# EAGLE board Module_T+H_04v (EAGLE 7.7.0)
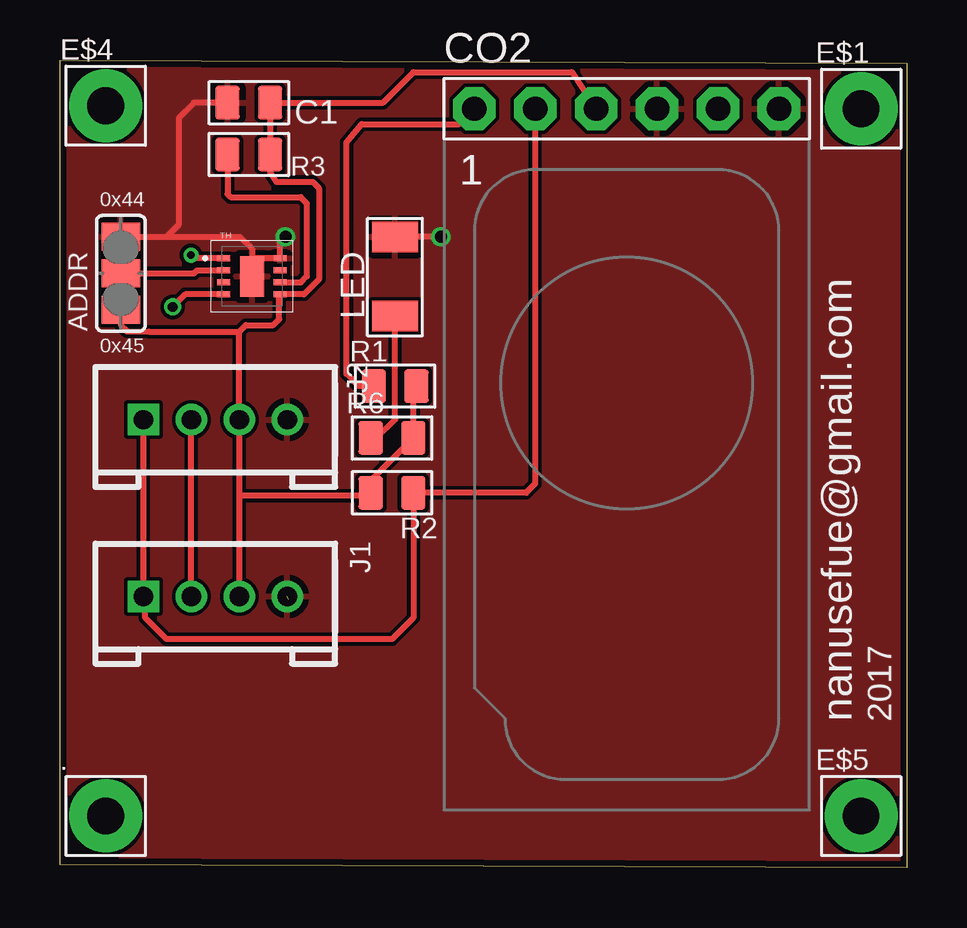
[diagram p0: board, top side]
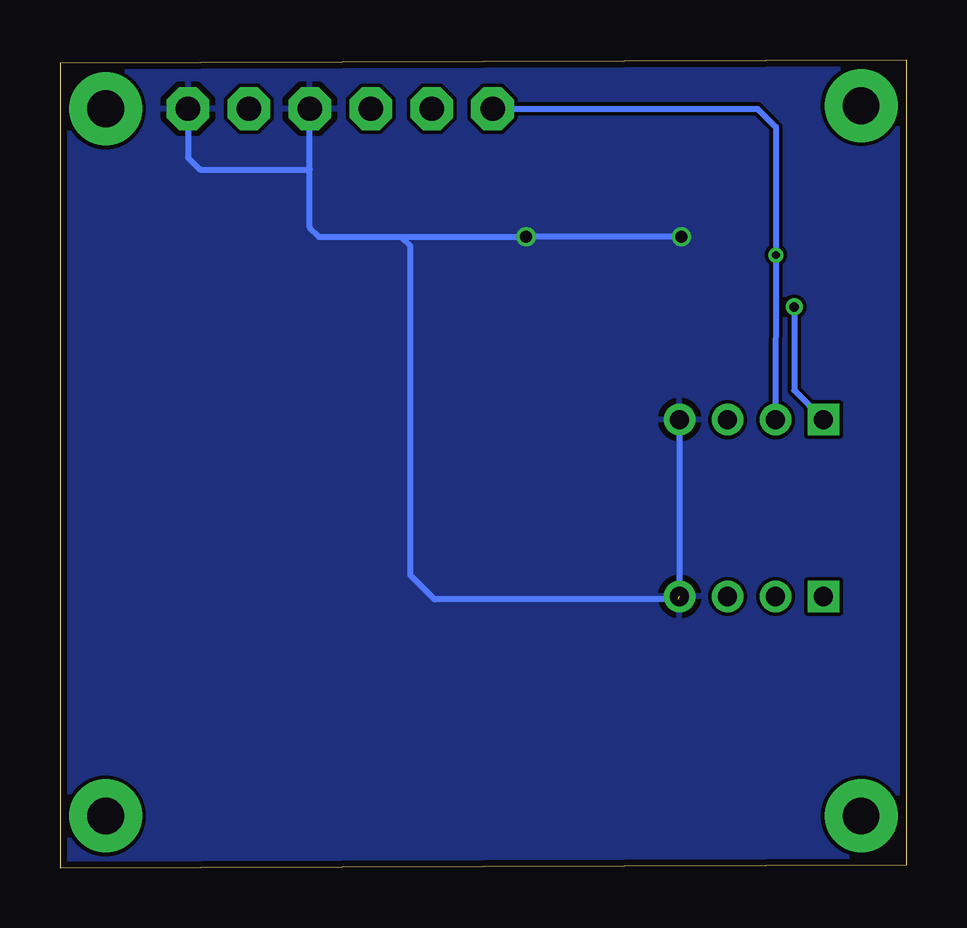
[diagram p1: board, bottom side, seen from below]

Size 35.31 x 33.66 mm. Coordinates in mm from the lower left corner, seen from the top.
Outline: 0,0.13 0,33.66 35.31,33.53 35.31,0 0,0.13
Copper layers (1*16): Top 0.035mm / dielectric 1.5mm / Bottom 0.035mm
Design rules "SeeedStudio_2layer_DRU_no_angle_20140221": minimum track width 6mil, minimum drill 12mil, track to track 6mil, track to pad 6mil, pad to pad 6mil, via to via 6mil, smd to smd 0mil, copper to edge 10mil, drill to drill 10mil, minimum pad ring 10mil, minimum via ring 6mil, stop-mask expansion 2mil, vias tented up to drill 100mil, thermal gap 10mil

## Footprints (pad centres in the part's own frame; a part is rotated, then mirrored left to right if it is on the bottom)
1P-100/60MIL = drill 1.524 pad 3.048: 1 0,0
SJ_2 = smd 1.168 x 1.6: 1 -1.524,0; 2 0,0; 3 1.524,0
C0805 = smd 1.397 x 1.016: 1 0,0.889; 2 0,-0.889
PINS = drill 1.016 pad 1.778 octagon: GND 1.27,0; NC/GND/10K 6.35,0; PWM/FC 3.81,0; RX/SCL -3.81,0; TX/SDA -6.35,0; VCC -1.27,0
HW4-2.0 = drill 0.8 pad 1.27 square: 1 -3,0 | drill 0.8 pad 1.27: 2 -1,0; 3 1,0; 4 3,0
LED1206FAB = smd 1.27 x 1.905: 1 -1.651,0; 2 1.651,0
R0805 = smd 1.397 x 1.016: 1 0,0.889; 2 0,-0.889
SHT3X = smd 0.55 x 0.25: P$1 -1.175,0.75; P$2 -1.175,0.25; P$3 -1.175,-0.25; P$4 -1.175,-0.75; P$5 1.175,-0.75; P$6 1.175,-0.25; P$7 1.175,0.25; P$8 1.175,0.75 | smd 1 x 1.7: PAD 0,0

## Placement (x,y rotation side)
.  GND  [1P-100/60MIL]  1.91,2.16 0 top
ADDR  [SJ_2]  2.54,24.77 90 top
C1  100nf  [C0805]  7.87,31.88 270 top
CO2  T6713-6H  [PINS]  23.62,31.62 0 top
E$1  [1P-100/60MIL]  33.4,31.62 0 top
E$4  [1P-100/60MIL]  1.91,31.75 0 top
E$5  gnd  [1P-100/60MIL]  33.4,2.16 0 top
J1  4P-2.0  [HW4-2.0]  6.48,11.3 0 top
J2  4P-2.0  [HW4-2.0]  6.48,18.67 0 top
LED  LEDFAB1206  [LED1206FAB]  13.97,24.64 90 top
R1  10K  [R0805]  13.97,20.07 90 top
R2  10K  [R0805]  13.84,15.62 270 top
R3  10K  [R0805]  7.87,29.72 90 top
R6  1.5K  [R0805]  13.84,17.91 90 top
TH  SHT31-DIS  [SHT3X]  8,24.64 0 top

## Library data of the parts
. E$1 E$4 E$5 J1 J2 = Seeed-OPL-Connector
ADDR = jumper
C1 = Seeed-OPL-Capacitor; MPN: CC0805KRX7R9BB104
CO2 = T6713-6H
LED = fab_2
R1-R3 = Seeed-OPL-Resistor; MPN: RC0805FR-0710KL
R6 = Seeed-OPL-Resistor; MPN: RC0805FR-071K5L
TH = thomasb9511

## Nets
ADDR: ADDR.2 TH.P$2
GND: ADDR.3 C1.2 CO2.GND CO2.NC/GND/10K J1.4 J2.4 LED.2 TH.P$8 TH.PAD
N$1: LED.1 R6.1
RST: R3.1 TH.P$6
SCL: CO2.RX/SCL J1.1 J2.1 R2.1 TH.P$4
SDA: CO2.TX/SDA J1.2 J2.2 R1.1 TH.P$1
VCC: ADDR.1 C1.1 CO2.VCC J1.3 J2.3 R1.2 R2.2 R3.2 R6.2 TH.P$5

## Tracks (layer width: path | path; a pad name or v marks a point on that pad's centre or on a via)
ADDR
  Top 0.254: ADDR.2 5.59,24.77 5.71,24.89 TH.P$2
GND  (via drill 0.5 pad 0.5)  (1 unrouted)
  Top 0.254: ADDR.3 4.45,26.29 | 4.45,26.29 7.49,26.29 8,25.78 8,25.27 | 8,25.27 TH.PAD | C1.2 5.59,31.88 4.95,31.24 4.95,26.8 4.45,26.29 | 8,25.27 8.12,25.39 TH.P$8 9.18,26.07 v9.4,26.29 | v15.88,26.29 LED.2
  Bottom 0.254: 24.89,29.08 24.89,26.67 24.51,26.29 21.08,26.29 | 24.89,29.08 CO2.GND | CO2.NC/GND/10K 29.97,29.59 29.46,29.08 24.89,29.08 | 9.48,26.21 v9.4,26.29 v15.88,26.29 21.08,26.29 | 21.08,26.29 20.7,25.91 20.7,12.19 19.94,11.43 19.68,11.18 9.53,11.18 | J2.4 J1.4
  pour Top: 0,33.66 0,0.13 35.43,0.13 35.43,33.66
  pour Bottom: 0,33.66 35.31,33.66 35.31,0.13 0,0.13
N$1
  Top 0.254: R6.1 13.21,17.91 13.97,18.67 LED.1
RST
  Top 0.254: R3.1 6.99,28.07 7.11,27.94 10.03,27.94 10.29,27.69 10.29,24.64 10.03,24.38 TH.P$6
SCL  (via drill 0.4 pad 0.5)
  Top 0.254: J2.1 J1.1 3.56,11.22 3.56,10.41 4.45,9.53 13.84,9.53 14.73,10.41 R2.1 19.43,15.62 19.81,16 CO2.RX/SCL | TH.P$4 5.22,23.89 v4.7,23.37
  Bottom 0.254: v4.7,23.37 4.7,19.89 J2.1
SDA  (via drill 0.32 pad 0.5)
  Top 0.254: J1.2 J2.2 | TH.P$1 5.6,25.39 v5.46,25.53 | R1.1 12.45,20.07 11.94,20.57 11.94,30.23 12.57,30.99 16.64,30.99 CO2.TX/SDA
  Bottom 0.254: J2.2 v5.46,25.53 5.46,30.86 6.22,31.62 CO2.TX/SDA
VCC
  Top 0.254: 7.48,15.49 J2.3 7.48,22.34 | 7.48,15.49 J1.3 | 7.48,15.49 12.95,15.49 R2.2 12.95,16.13 R6.2 14.73,19.94 R1.2 | 7.48,22.34 7.75,22.61 8.89,22.61 9.14,22.86 9.14,23.86 TH.P$5 10.17,23.89 10.79,24.51 10.79,28.32 10.54,28.57 9.02,28.57 8.76,28.96 R3.2 C1.1 13.46,31.88 14.73,33.15 21.34,33.15 CO2.VCC | ADDR.1 2.54,22.61 2.79,22.35 3.7,22.34 7.48,22.34

## Text on the board
tPlace: 0x44 | 0x45 | nanusefue@gmail.com | 2017